# Altium PCB teplomer.PCBDOC
Units mil, origin at the board's own origin, x right, y up, seen from the top; angles counter-clockwise.
Board outline 6000 x 4000 mil, 2 copper layers (Top Layer, Bottom Layer); 19 components, 14 nets, 57 pads, 0 vias.
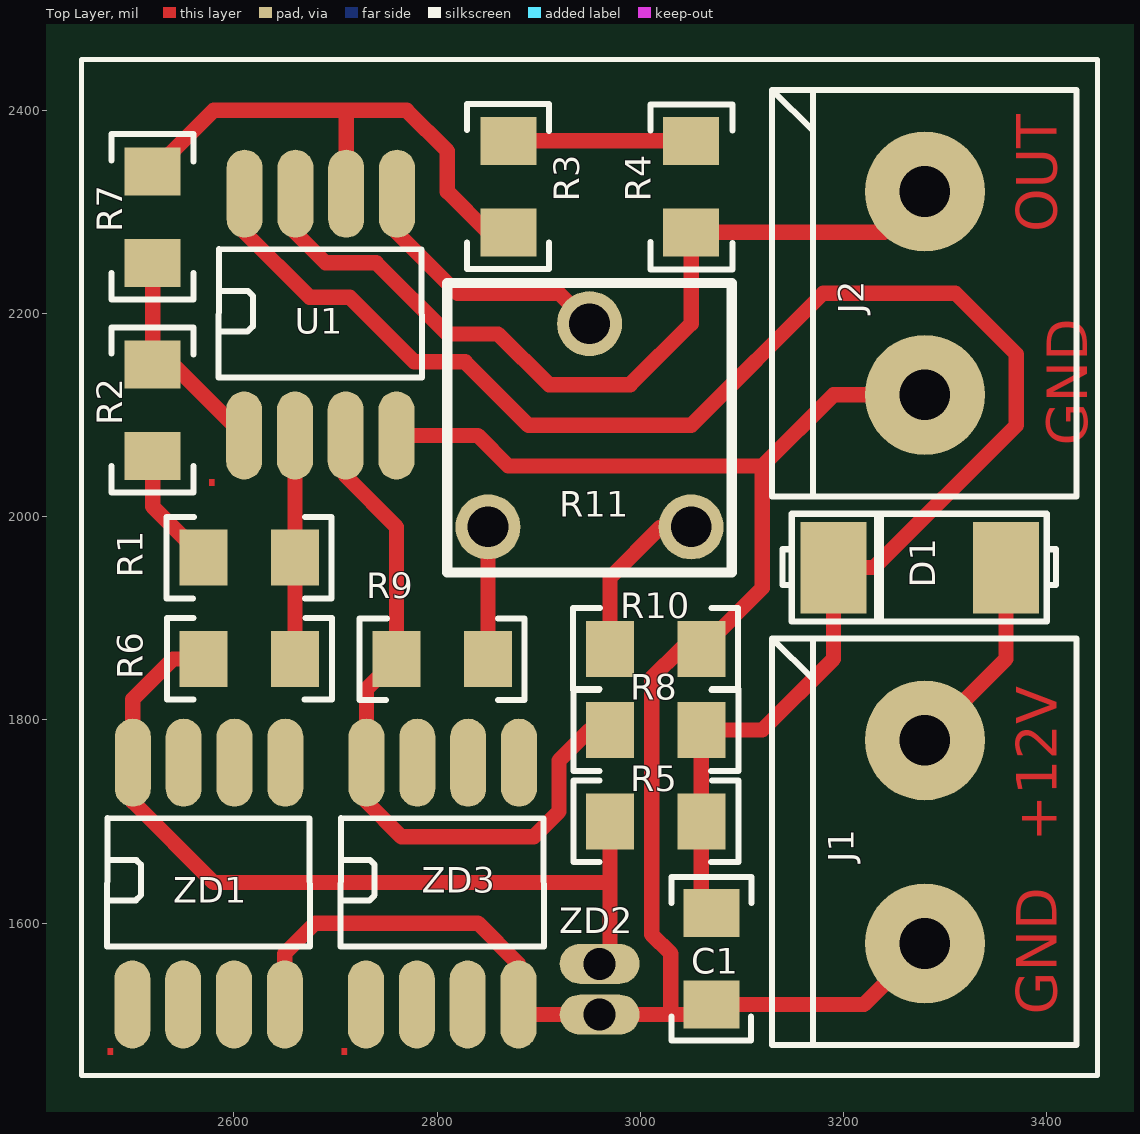
[diagram p0: Top Layer view]
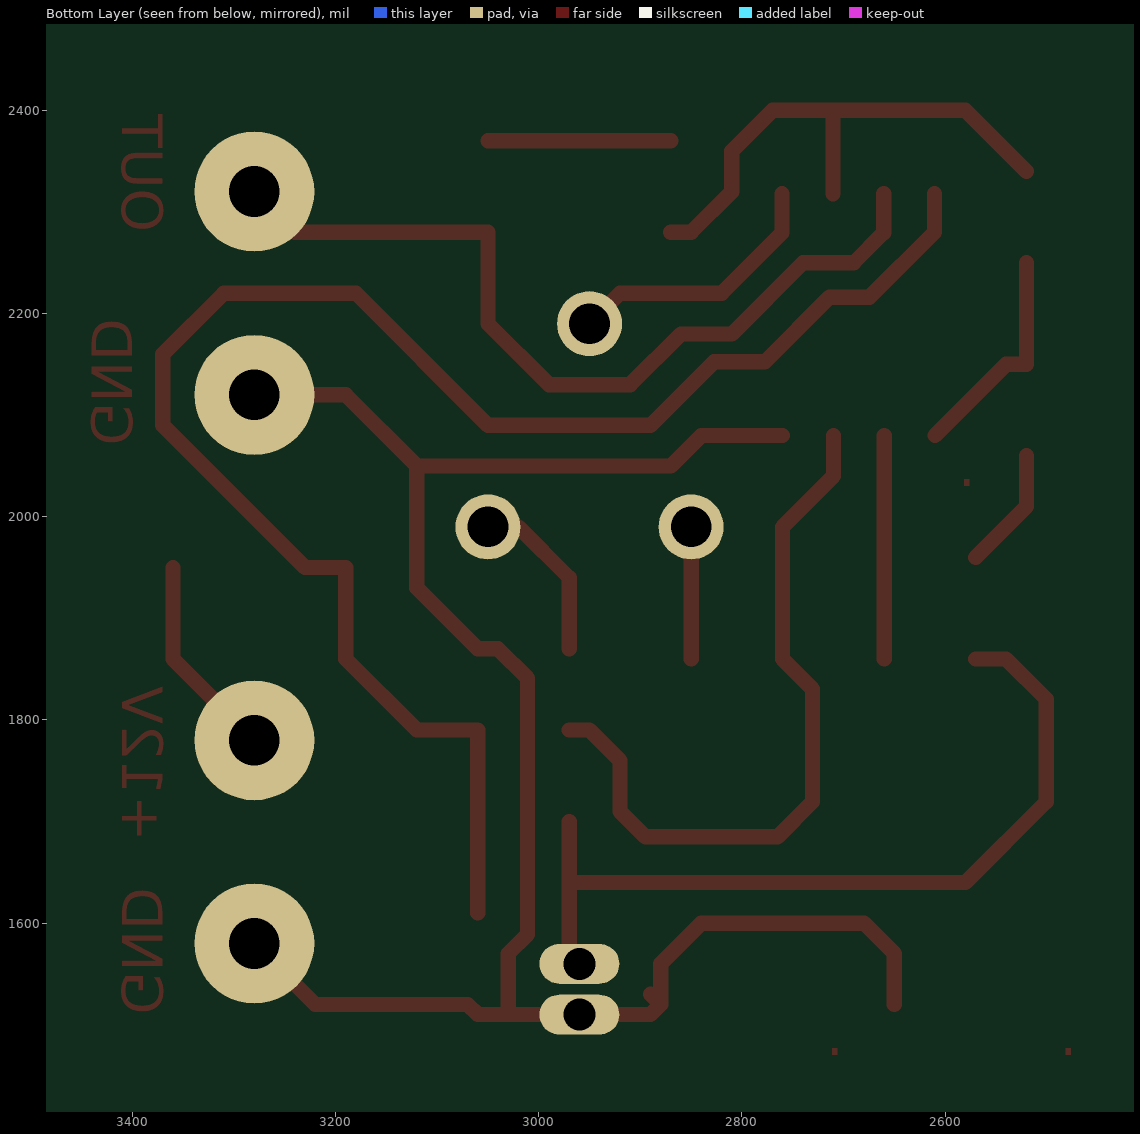
[diagram p1: Bottom Layer view, seen from below]

## Layer stack, top to bottom
Top Layer: signal copper 1.4
Dielectric: dielectric 12.6, FR-4, Dk 4.8
Bottom Layer: signal copper 1.4

## Board outline
1000,1000 7000,1000 7000,5000 1000,5000

## Design rules (kind name [scope] priority, off if disabled: settings)
Clearance [All] p1: gap=10
ComponentClearance [All] p1 off: gap=0 collisioncheckmode=0 verticalgap=10
PolygonConnect [All] p1: connectstyle=Relief reliefconductorwidth=10 reliefentries=4 polygonreliefangle="90 Angle"
RoutingVias [All] p1: holewidth=28 width=50 viastyle="Through Hole" minholewidth=28 minwidth=50 maxholewidth=28 maxwidth=50
SolderMaskExpansion [All] p1: expansion=4
TestPointUsage [All] p1: valid=0 allowmultiple=FALSE
Testpoint [All] p1: side=15 testpointundercomponent=TRUE minsize=40 maxsize=100 preferedsize=60 minholesize=0 maxholesize=40 preferedholesize=32 testpointgrid=1 style=1023 order=0-112345678
Width [All] p1: maxlimit=50 minlimit=10 preferedwidth=10 toplayer_prefwidth=15 minimp=50.000000 maximp=50.000000 favimp=50.000000
17 further rules are at their usual default settings.

## Classes and differential pairs
component class teplomer: C1 D1 J1 J2 R1 R2 R3 R4 R5 R6 R7 R8 R9 R10 R11 U1 ZD1 ZD3

## Components (designator, comment, footprint, x,y, rotation, side; value= is the part's Value field where it differs from the comment)
C1 "C" C0805 3070,1520 r90 top
D1 "D" SMA 3310,1950 r180 top
J1 "CON_2" ARK_2 3280,1780 r270 top
J2 "CON_2" ARK_2 3280,2320 r270 top
R1 "10k" R0805 2570,1960 r0 top
R2 "10k" R0805 2520,2150 r270 top
R3 "27k" R0805 2870,2370 r270 top
R4 "33k" R0805 3050,2280 r90 top
R5 "10k" R0805 3060,1700 r180 top
R6 "10k" R0805 2660,1860 r180 top
R7 "12k" R0805 2520,2340 r270 top
R8 "10k" R0805 3060,1790 r180 top
R9 "25k" R0805 2760,1860 r0 top
R10 "27k" R0805 2970,1870 r0 top
R11 "4k7" "Trimr PT655" 3050,1990 r180 top
U1 "MC1458D" SO8 2610,2080 r90 top
ZD1 "LM135" SO8 2500,1520 r90 top
ZD2 "LM135" TO-92 2960,1560 r0 top
ZD3 "LM136" SO8 2730,1520 r90 top

## Footprints (in the part's own frame and the unit in brackets; to place one, negate y for a bottom-side part, rotate by r counter-clockwise, add the part's x,y. Pads: shape width x height; smd on the part's side, far side on the other; paste and mask are expansions set on the pad)
ARK_2 [mm]
  round 3 hole 1.27: 1(0,0) 2(5.08,0)
  silkscreen extent -2.54,-3.82 7.62,3.8
C0805 [mm]
  rect 1.2x1.4 smd: 1(0,0) 2(2.286,0)
  silkscreen extent -0.9,-1 3.19,1
R0805 [mm]
  rect 1.2x1.4 smd: 1(0,0) 2(2.286,0)
  silkscreen extent -0.93,-1.03 3.2,1.02
SMA [mil]
  rect 65x90 smd: 1(-50,0) 2(120,0)
  silkscreen extent -99,-53 170,53
SO8 [mm]
  oval 2.2x0.9 smd: 1(0,0) 2(0,-1.27) 3(0,-2.54) 4(0,-3.81) 5(6.045,-3.823) 6(6.045,-2.553) 7(6.045,-1.283) 8(6.045,-0.013)
  silkscreen extent 1.45,-4.44 4.66,0.64
TO-92 [mm]
  oval 2x1 hole 0.8: 2(0,0) 3(0,-1.27)
"Trimr PT655" [mil] "Resistor variable"
  round 64 hole 40: 1(0,0) 2(200,0) 3(100,-200)
  silkscreen extent -40,-240 240,45

## Part data
R1 R2 R3 R4 R5 R6 R7 R8 R9 R10: library part R
R11: library part Trimr
U1: "Dual Operational Amplifier"
ZD3: library part LM135

## Nets (pads, with @x,y where several pads share a name; then routed paths per layer and width w, separated by ;. In a path a pad name is that pad's centre, name@x,y a point inside that pad or via, vN(x,y) a via of type N, cw(c..) or ccw(c..) an arc to the next point about the centre after c; other vN are vias at no path point)
GND: C1.1 J1.2 J2.2 R10.2 U1.4 ZD1.4 ZD2.3 ZD3.4 | length 1962.3
  Top Layer w15: ZD1.4 2650,1570 2680,1600 2840,1600 2880,1560 ZD3.4 ; U1.4 2840,2080 2870,2050 3120,2050 ; ZD3.4@2890,1530 ZD3.4 ; 3030,1510 3030,1570 3011.12,1588.88 3011.12,1841.12 3040,1870 R10.2 3120,1930 3120,2050 ; J1.2 3220,1520 C1.1 3060,1510 2890,1510 ZD3.4 ; J2.2 3190,2120 3120,2050
NetD1_1: D1.1 J1.1 | length 203.1
  Top Layer w15: J1.1 3360,1860 D1.1
NetJ2_1: J2.1 R4.1 U1.7 | length 851.3
  Top Layer w15: U1.7 2660.5,2279.5 2690,2250 2740,2250 2810,2180 2860,2180 2910,2130 2990,2130 3050,2190 R4.1 3240,2280 J2.1
NetR1_1: R1.1 R2.2 | length 120.7
  Top Layer w15: R2.2 2520,2010 R1.1
NetR1_2: R1.2 R6.1 U1.2 | length 220
  Top Layer w15: R6.1 U1.2
NetR2_1: R2.1 R7.2 U1.1 | length 219
  Top Layer w15: R7.2 R2.1 2540,2150 U1.1
NetR3_1: R3.1 R4.2 | length 180
  Top Layer w15: R3.1 R4.2
NetR3_2: R3.2 R7.1 U1.6 | length 530.2
  Top Layer w15: R7.1 2580,2400 2770,2400 2810,2360 2810,2320 2850,2280 R3.2 ; 2710,2400 2710.5,2399.5 U1.6
NetR5_2: R5.2 R6.2 ZD1.8 ZD2.2 | length 809.3
  Top Layer w15: R6.2 2540,1860 2500.5,1820.5 2500.5,1719.5 2580,1640 2970,1640 ; 2970,1580 R5.2
NetR8_2: R8.2 R9.1 U1.3 ZD3.8 | length 720
  Top Layer w15: U1.3 2710,2040 2760,1990 R9.1 2730.5,1830.5 2730.5,1719.5 2765,1685 2895,1685 2920,1710 2920,1760 2950,1790 R8.2
NetR9_2: R9.2 R11.2 | length 130
  Top Layer w15: R9.2 R11.2
NetR10_1: R10.1 R11.1 | length 170.7
  Top Layer w15: R10.1 2970,1940 3020,1990 R11.1
NetR11_3: R11.3 U1.5 | length 265.1
  Top Layer w15: U1.5 2760.5,2279.5 2820,2220 2920,2220 R11.3
VS: C1.2 D1.2 R5.1 R8.1 U1.8 | length 1691.9
  Top Layer w15: U1.8 2610.5,2280 2674.36,2216.14 2713.86,2216.14 2777.55,2152.45 2827.55,2152.45 2890,2090 3050,2090 3180,2220 3310,2220 3370,2160 3370,2090 3230,1950 D1.2 3190,1860 3120,1790 R8.1 R5.1 C1.2@3060,1610
pads on no net: ZD1.1 ZD1.2 ZD1.3 ZD1.5 ZD1.6 ZD1.7 ZD3.1 ZD3.2 ZD3.3 ZD3.5 ZD3.6 ZD3.7

## Other copper
Top Layer:
  text "OUT" at 3410,2280 h40 r90
  text "GND" at 3440,2070 h40 r90
  text "." at 2570,2030 h40
  text "+12V" at 3410,1680 h40 r90
  text "GND" at 3410,1510 h40 r90
  text "." at 2470,1470 h40
  text "." at 2700,1470 h40

## Silkscreen, mask and mechanical layers (free items; w line width, h text height)
Top Overlay:
  lines w5: 2450,1450 3450,1450 3450,2450 2450,2450 2450,1450
Mechanical 1:
  lines w5: 2450,1450 3450,1450 3450,2450 2450,2450 2450,1450

## Dimensions
2450,2450 to 2440,1450 on Mechanical 1
2450,1450 to 3450,1450 on Mechanical 1